# Altium PCB v1.1-19Vto13VBuckConverterPCBwithPads.PcbDoc
Units mil, origin at the board's own origin, x right, y up, seen from the top; angles counter-clockwise.
Board outline 970 x 725 mil, 2 copper layers (Top Layer, Bottom Layer); 5 components, 4 nets, 24 pads, 2 vias.
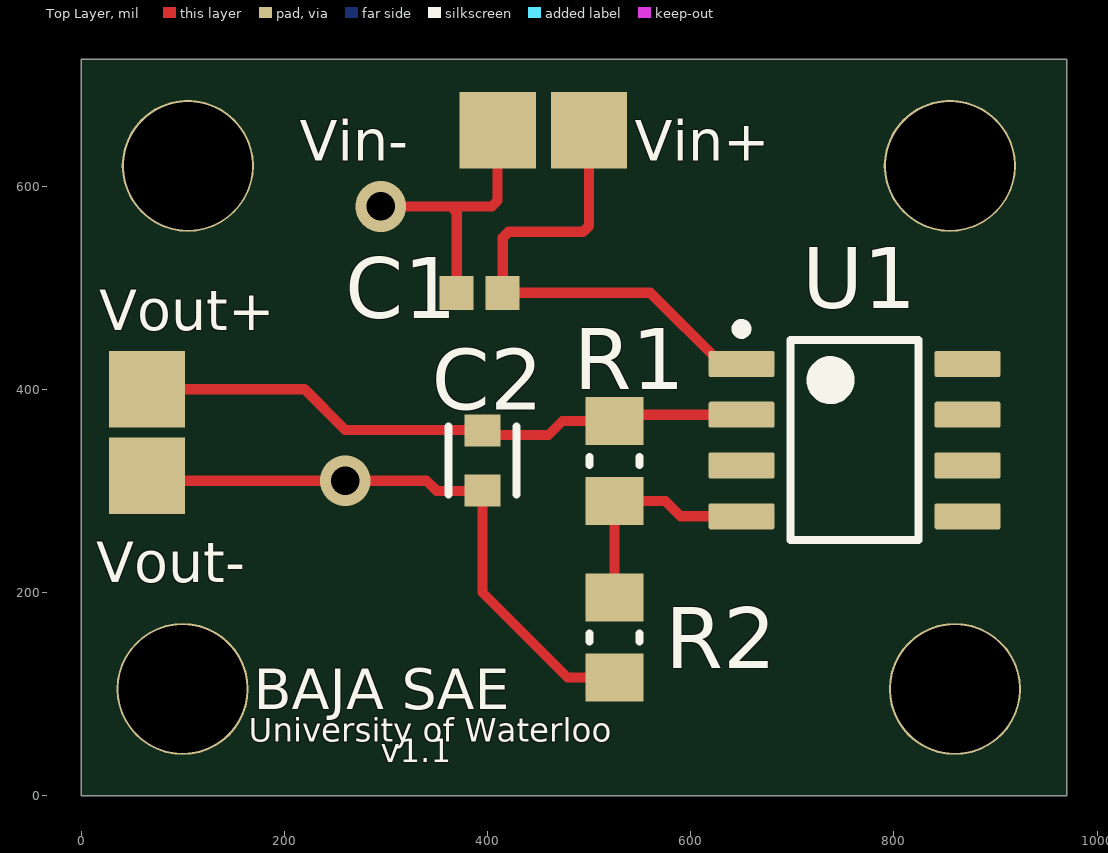
[diagram p0: Top Layer view]
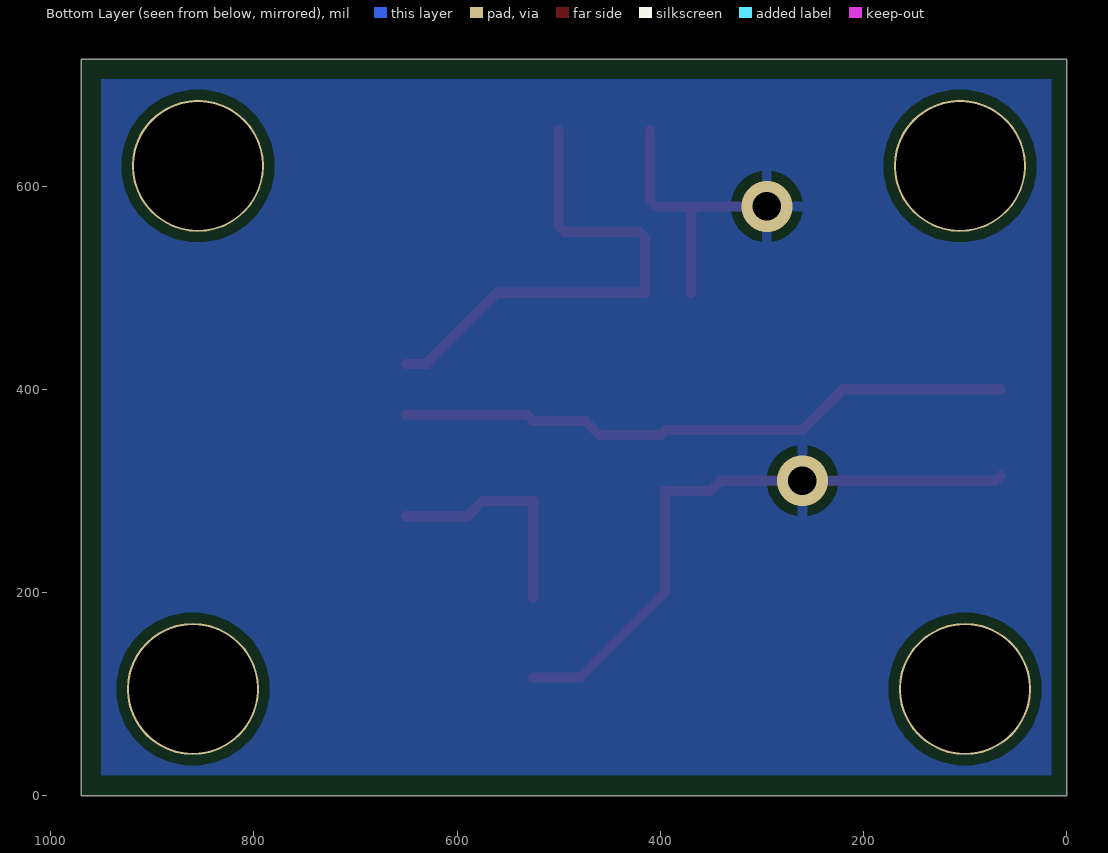
[diagram p1: Bottom Layer view, seen from below]
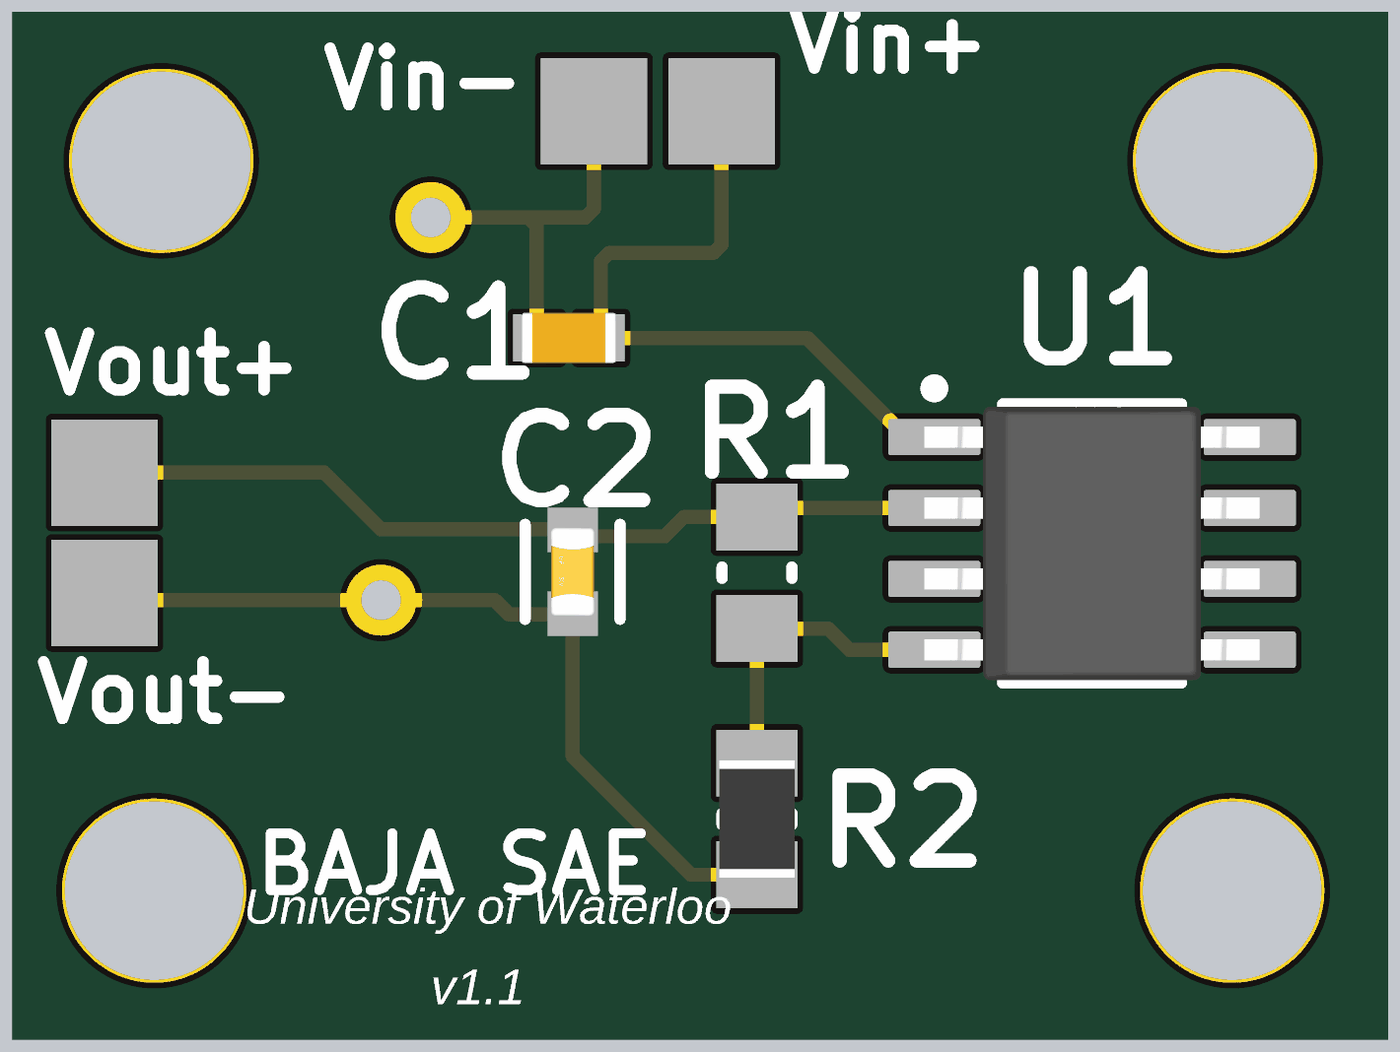
[diagram p2: 3D render of the assembled board from above, using the file's embedded part models]

## Layer stack, top to bottom
Top Solder: solder mask 0.4, Solder Resist, Dk 3.5
Top Layer: signal copper 1.4
Dielectric 1: dielectric 12.6, FR-4, Dk 4.8
Bottom Layer: signal copper 1.4
Bottom Solder: solder mask 0.4, Solder Resist, Dk 3.5

## Board outline
0,0 0,725 970,725 970,0

## Design rules (kind name [scope] priority, off if disabled: settings)
Clearance [All] p1: gap=10 ignorepadtopadclearanceinfootprint=FALSE
PolygonConnect [All] p1: connectstyle=Relief reliefconductorwidth=10 reliefentries=4 polygonreliefangle="90 Angle" airgapwidth=10
RoutingVias [All] p1: holewidth=28 width=50 viastyle="Through Hole" minholewidth=28 minwidth=50 maxholewidth=28 maxwidth=50
SolderMaskExpansion [All] p1: expansion=4 istentingtop=FALSE
SupplyNets "Schematic Supply Nets" [InNet('GND')] p1: voltage=0.000
Width [All] p1: maxlimit=10 minlimit=10 preferedwidth=10
30 further rules are at their usual default settings.

## Components (designator, comment, footprint, x,y, rotation, side; value= is the part's Value field where it differs from the comment)
C1 "CC0603ZRY5V9BB104" CAPC1608X90X40LL10T20 392.36,495 r0 top value=0.1µF
C2 "CC0603KRX5R8BB105" FP-CC0603-DA-MFG 395,330 r270 top value="1 uF"
R1 "RC0805FR-07105RL" RESC2013X60X35ML10T20 525,329.37 r90 top value="105 R"
R2 "RC0805FR-071KL" RESC2013X60X35ML10T20 525,155.63 r270 top value="1 kR"
U1 "LM317LIDR" D0008A_M 761.22,350 r0 top

## Footprints (in the part's own frame and the unit in brackets; to place one, negate y for a bottom-side part, rotate by r counter-clockwise, add the part's x,y. Pads: shape width x height; smd on the part's side, far side on the other; paste and mask are expansions set on the pad)
CAPC1608X90X40LL10T20 [mm] "Chip Capacitor, 2-Leads, Body 1.70x0.90mm, IPC High Density"
  rect 0.85x0.85 smd: 1(-0.575,0) 2(0.575,0)
  body extent -0.85,-0.45 0.85,0.45, height 0.9
D0008A_M [mm] "SOIC, 8-Leads, Body 5x4mm, Pitch 1.27mm, IPC Low Density"
  rrect15% 1.65x0.65 smd: 1(-2.825,1.905) 2(-2.825,0.635) 3(-2.825,-0.635) 4(-2.825,-1.905) 5(2.825,-1.905) 6(2.825,-0.635) 7(2.825,0.635) 8(2.825,1.905)
  silkscreen extent -2.95,-2.5 1.6,2.9, body extent -3,-2.45 3,2.45, height 1.63
FP-CC0603-DA-MFG [mm]
  rect 0.8x0.9 smd paste+0 mask+0: 1(-0.75,0) 2(0.75,0)
  silkscreen extent -0.85,-0.85 0.85,0.85, body extent -1.35,-0.75 1.35,0.75, height 0.25
RESC2013X60X35ML10T20 [mm] "Chip Resistor, 2-Leads, Body 2.00x1.25mm, IPC Low Density"
  rect 1.2x1.45 smd: 1(-1,0) 2(1,0)
  silkscreen extent -0.1,-0.63 0.1,0.63, body extent -1.05,-0.67 1.05,0.67, height 0.6

## Part data
C1: library part CMP-1035-02594-2, "Chip Capacitor, 100 nF, - 20% to + 80%, 50 V, -30 to 85 degC, 0603 (1608 Metric), RoHS, Tape and Reel", Capacitance=0.1µF, Manufacturer=Yageo, Operating Temperature=-30°C~85°C, Package / Case=0603(1608Metric), Package Description="2-Pin Surface Mount Device, Body 1.6 x 0.8 mm", Package Reference=0603, Ratings=-, Standard Package=1, Temperature Coefficient=Y5V(F), Tolerance=-20%,+80%, Voltage - Rated=50V, Applications=GeneralPurpose, Category=Capacitors, Datasheet URL=https://datasheet.ciiva.com/17434/upy-gphc-y5v-6-3v-to-50v-5-17434523.pdf, Datasheet Version="Rev. 5, 07/2010", Family=CeramicCapacitors, Featured Product=CommodityMultilayerCeramicCapacitors–CCSeries, Features=-, Height - Seated (Max)=-, Kits=CC060300000000000-ND-MLCC0603SAMPLEKIT, Lead Spacing=-, Lead Style=-, Manufacturer URL=http://www.yageo.com/, Mounting Technology=SurfaceMount, Mounting Type=SurfaceMount,MLCC, Online Catalog=CCSeries, Other Names=311-1343-1, Packaging=CutTape(CT), Product Training Modules=MultilayerCeramicCapacitors, Series=CC, Size / Dimension="0.063\"Lx0.031\"W(1.60mmx0.80mm)", Thickness (Max)="0.035\"(0.90mm)"
C2: library part CMP-03422-000612-1, "CAP CER 1UF 25V X5R 0603", Capacitance="1 uF", Manufacturer=YAGEO, Package=CC0603-DA, Temperature="-55°C to +125°C", Temperature Characteristic=X5R, Temperature Coefficient=15%, Temperature Range High=+125°C, Temperature Range Low=-55°C, Tolerance=0.1, Voltage="25 V", Automotive=No, Category=Cap, ComponentLink2Description=Datasheet, ComponentLink2URL=http://www.yageo.com/documents/recent/UPY-GPHC_X7R_6.3V-to-50V_18.pdf, Device Class L1="Passive Components", Device Class L2=Capacitors, Device Class L3="Ceramic Capacitors", Digikey Description="CAP CER 1UF 25V X5R 0603", Footprint Url=http://www.yageo.com/exep/pages/download/literatures/UPY-C_GEN_24.pdf, Height=0.9mm, Lead Free=Yes, Manufacturer Part Number=CC0603KRX5R8BB105, Material=Ceramic, Mouser Description="Multilayer Ceramic Capacitors MLCC - SMD/SMT 1.0uF 25V X5R 10%", Octopart=https://octopart.com/cc0603krx5r8bb105-yageo-9292811, RoHS=TRUE, Voltage Rating="25 V"
R1: library part CMP-2001-04572-1, Manufacturer=Yageo, Resistance="105 R", Part Number=RC0805FR-07105RL
R2: library part CMP-2100-03671-1, "Chip Resistor, 1 KOhm, +/- 1%, 125 mW, -55 to 155 degC, 0805 (2012 Metric), RoHS, Tape and Reel", Case Code (Imperial)=0805, Case Code (Metric)=2012, Manufacturer=Yageo, Max Operating Temperature=155degC, Max Power Dissipation=125mW, Min Operating Temperature=-55degC, Package Description="2-Pin Surface Mounted Device, Body 2 x 1.25 mm", Package Quantity=1, Resistance="1 kR", Temperature Coefficient=100ppm/degreesC, Tolerance=1%, Voltage Rating=150V, Case/Package=0805, Composition=ThickFilm, Datasheet URL=http://www.yageo.com/NewPortal/yageodocoutput?fileName=/pdf/R-Chip/PYu-RC_Group_51_RoHS_L_5.pdf, Datasheet Version="Rev. 5, 10/2016", Depth=1.25mm, Height=0.024inch, Lead Free=LeadFree, Length=0.079inch, Manufacturer URL=http://www.yageo.com/, Military Standard=Not, Number of Pins=2, Number of Terminations=2, Package Reference=0805, Packaging=TapeandReel, Power Rating=125mW, REACH SVHC=Unknown, RoHSCompliant=true, Termination=SMD/SMT, Voltage Rating (DC)=150V, Width=0.049inch
U1: library part CMP-0324-00101-3, "Adjustable Regulator with 3.7 to 38 V Input and 1.2 to 32 V Output, -40 to 125 degC, 8-Pin SOIC (D), Green (RoHS & no Sb/Br)", Manufacturer="Texas Instruments", Code_JEDEC=MS-012AA, ComponentLink1Description=Datasheet, ComponentLink1URL=http://www.ti.com/general/docs/lit/getliterature.tsp?genericPartNumber=LM317L&fileType=pdf, ComponentLink2Description="Package Specification", ComponentLink2URL=http://www.ti.com/litv/pdf/msoi002j, ComponentLink3Description="URL Link1", ComponentLink3URL="Samples URL:http://www.ti.com/product/lm317l#samples", DatasheetVersion=SLCS144D, Eco-Plan="Green (RoHS & no Sb/Br)", Iout(Max)(A)=0.1, Mounting Technology="Surface Mount", PackageDescription="8-Pin Plastic Small Outline Integrated Circuit, 4.9 x 3.9 mm, Pitch 1.27 mm Pitch", PackageReference=D0008A, PackageVersion="revM, Jun-2011", PartNumber=LM317LIDR, Vin(Max)(V)=38, Vin(Min)(V)=3.7, Vout(Max)(V)=32, Vout(Min)(V)=1.2

## Free pads (board coordinates)
  round 130 hole 126 unplated: MT1(105,620) MT2(855,620) MT3(100,105) MT4(860,105)
  rect 75x75 smd: Vin+(500,655) Vin-(410,655) Vout+(65,400) Vout-(65,315)

## Via types
v1: diameter 50, hole 28, Top Layer to Bottom Layer, 2 vias

## Nets (pads, with @x,y where several pads share a name; then routed paths per layer and width w, separated by ;. In a path a pad name is that pad's centre, name@x,y a point inside that pad or via, vN(x,y) a via of type N, cw(c..) or ccw(c..) an arc to the next point about the centre after c; other vN are vias at no path point)
GND: C1.1 C2.2 pad.Vin- pad.Vout- R2.2 | length 875.6
  Top Layer w10: pad.Vout- 70,310 v1(260,310) 340,310 350,300 394.53,300 C2.2 395,200 478.74,116.26 R2.2 ; v1(295,580) 363.87,580 ; C1.1 369.72,574.14 363.87,580 ; pad.Vin- 410,585.86 404.14,580 363.87,580
NetR1_1: R1.1 R2.1 U1.4 | length 226.2
  Top Layer w10: R2.1 R1.1 575,290 590,275 U1.4
Vin+: C1.2 pad.Vin+ U1.1 | length 502.1
  Top Layer w10: pad.Vin+ 500,560.86 494.14,555 420.86,555 415,549.14 C1.2 560.32,495 630.32,425 U1.1
Vout+: C2.1 pad.Vout+ R1.2 U1.2 | length 611.9
  Top Layer w10: pad.Vout+ 220,400 260,360 394.53,360 C2.1 399.53,355 460,355 473.74,368.74 R1.2 531.26,375 U1.2
pads on no net: U1.3 U1.5 U1.6 U1.7 U1.8

## Polygon pours and split planes (outlines as drawn)
GND on Bottom Layer "GND_L02_P000" (solid, pour order 0): 950,705 950,20 15,20 15,705

## Silkscreen, mask and mechanical layers (free items; w line width, h text height)
Top Overlay:
  text "Vin-" at 215,625 h40
  text "Vin+" at 545,625 h40
  text "Vout+" at 18,458 h40
  text "Vout-" at 15,210 h40
  text "BAJA SAE" at 170,85 h40
  text "University of Waterloo" at 165,45 h40
  text "v1.1" at 295,25 h40